# Altium PCB PCB2.PcbDoc (part 2 of 3)
Units mm, origin at the board's own origin, x right, y up, seen from the top; angles counter-clockwise.
Board outline 152.4 x 101.6 mm, 4 copper layers (Top Layer, Int1 (GND), Int2 (PWR), Bottom Layer), stack 1.569 mm thick; 115 components, 81 nets, 561 pads, 241 vias.
Unrouted connection lines stored in the file: 9.
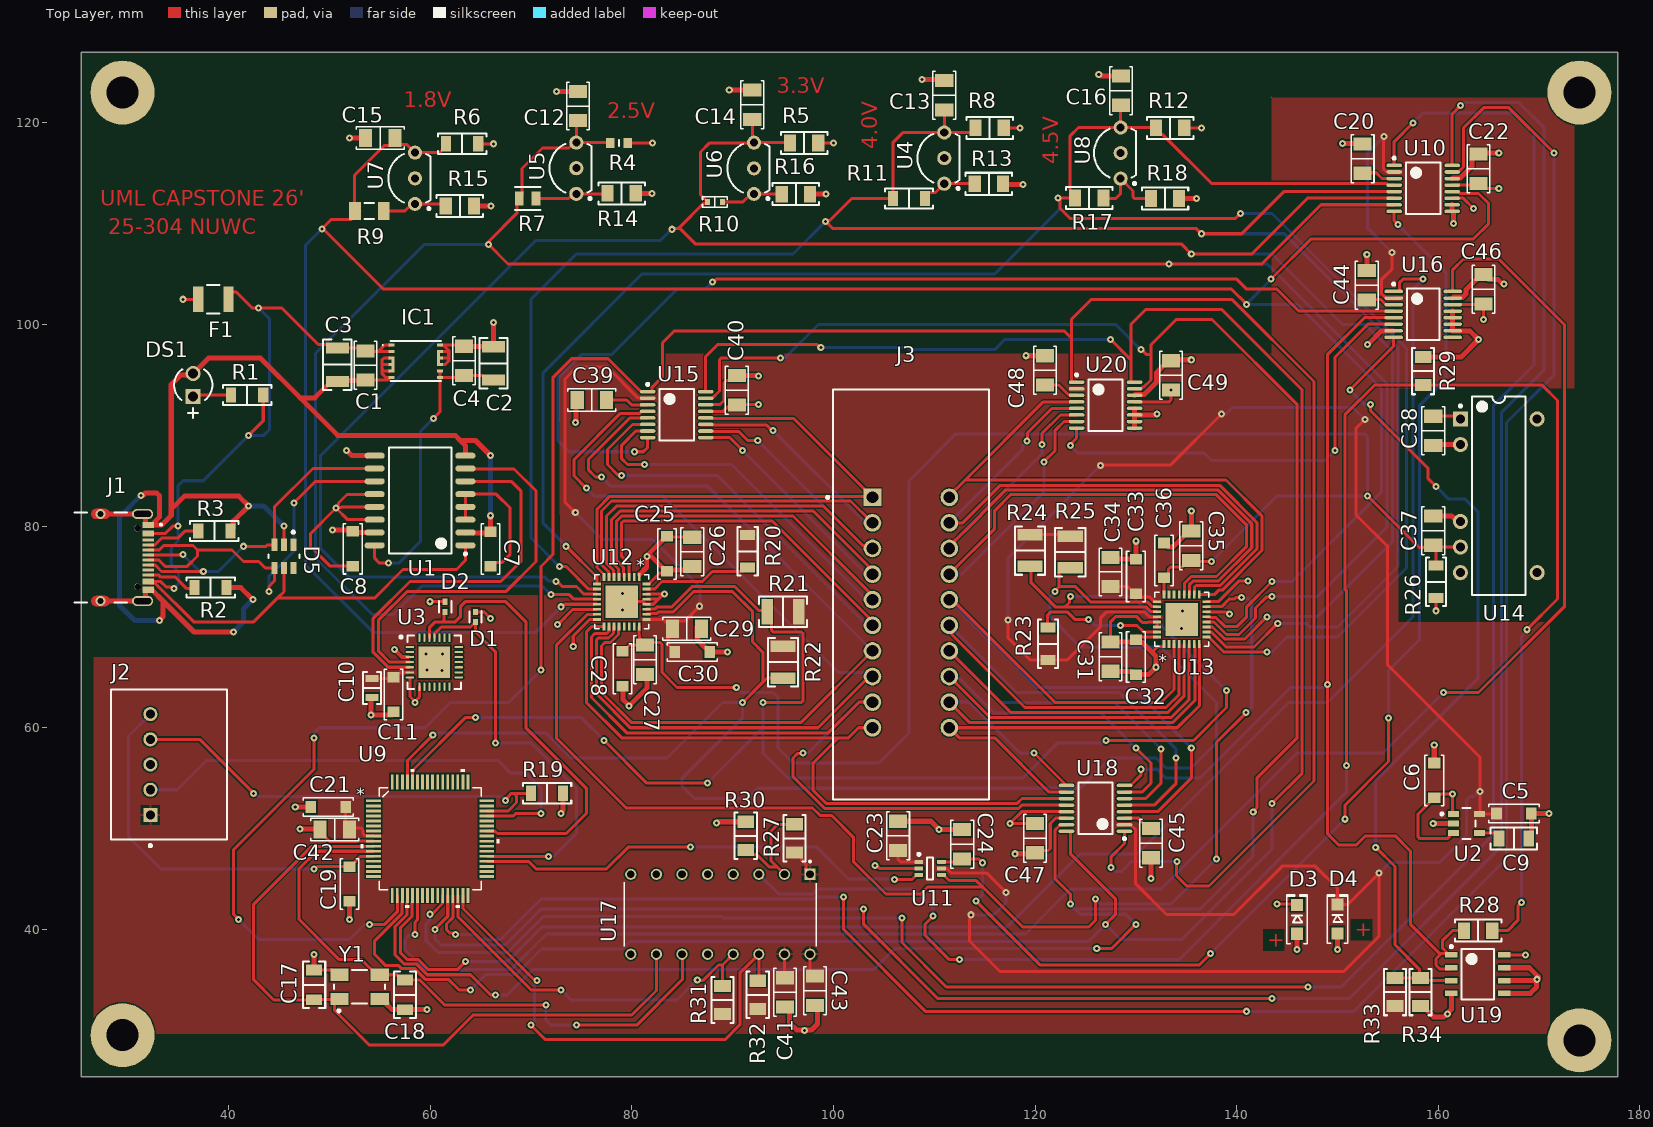
[diagram p0: Top Layer view]

## Via types
v1: diameter 0.7, hole 0.3, Top Layer to Bottom Layer, 241 vias

## Nets (pads, with @x,y where several pads share a name; then routed paths per layer and width w, separated by ;. In a path a pad name is that pad's centre, name@x,y a point inside that pad or via, vN(x,y) a via of type N, cw(c..) or ccw(c..) an arc to the next point about the centre after c; other vN are vias at no path point) (continued)
2X5: (continued)
  Top Layer w0.3: U18.10@123.125,53.625 121.375,53.625 116,59 112.5,59 J3.11@111.5,60 134.121,60 136.31,62.19 136.31,68.285 U13.8@136.298,68.298
2X6: J3.20 U13.17 U20.4 | length 59
  Top Layer w0.3: J3.20@111.5,82.86 111.5,83 113.07,84.57 ; U20.4@124.125,92.325 120.825,92.325 113.07,84.57 ; U13.17@136.298,73.202 137.781,73.202 138.231,73.652 138.577,73.652 142.5,77.575 142.5,81.02 138.95,84.57 113.07,84.57
2X7: J3.19 U13.18 U20.5 | length 62.7
  Top Layer w0.3: J3.19@111.5,80.32 112.82,80.32 116.55,84.05 138.314,84.05 142,80.364 142,77.727 138.375,74.102 138.043,74.102 138.041,74.1 135.973,74.1 135.798,73.924 U13.18@135.798,73.202 ; v1(119.2,88.45) 119.25,88.5 119.25,89.25 121.675,91.675 U20.5@124.125,91.675
  Bottom Layer w0.3: J3.19@111.5,80.32 118.743,87.563 118.743,87.885 119.2,88.342 v1(119.2,88.45)
2X8: J3.18 U13.19 U20.6 | length 64.4
  Top Layer w0.3: J3.18@111.5,77.78 111.5,78 113,79.5 113.022,79.5 114.663,81.141 114.663,81.175 117.088,83.6 138.127,83.6 141.5,80.227 141.5,77.864 138.189,74.552 137.857,74.552 137.854,74.55 135.686,74.55 135.31,74.174 135.31,73.215 U13.19@135.298,73.202 ; v1(120.7,88.1) 120.7,89.2 122.525,91.025 U20.6@124.125,91.025
  Bottom Layer w0.3: J3.18@111.5,77.78 111.5,77.99 120.7,87.19 v1(120.7,88.1)
2X9: J3.17 U13.20 U20.7 | length 67.8
  Top Layer w0.3: J3.17@111.5,75.24 116,79.74 116,81.529 117.621,83.15 137.941,83.15 141,80.091 141,78 138.002,75.002 137.67,75.002 137.668,75 135.5,75 134.81,74.31 134.81,73.215 U13.20@134.798,73.202 ; v1(120.872,86.372) 122,87.5 122,89.5 122.875,90.375 U20.7@124.125,90.375
  Bottom Layer w0.3: J3.17@111.5,75.24 112.74,75.24 120.872,83.372 v1(120.872,86.372)
2Y0: C16.2 R12.1 R17.2 U8.3 U10.4 U12.9 U13.9 | length 214.2
  Top Layer w0.3: v1(73.5,78) 76.548,74.952 U12.9@76.548,74.25 ; v1(122.275,112.55) 122.5,112.55 123.75,112.55 123.525,112.775 123.525,113.364 123.488,113.401 123.488,118.713 124.315,119.54 U8.3@128.5,119.54 ; v1@122.5,112.5 122.5,111.5 123.475,110.525 139.893,110.525 v1(140.368,111) ; C16.2@128.575,121.55 128.5,121.475 U8.3@128.5,119.54 ; U13.9@137,69 137.24,69 138.74,67.5 v1(143,67.5) ; U10.4@155.625,113.825 155.011,113.825 154.836,114 137.5,114 132.675,118.825 132.45,118.825 132,119.275 R12.1@132,119.5 131.96,119.54 U8.3@128.5,119.54
  Bottom Layer w0.3: v1(73.5,78) 71.175,80.325 71.175,95.175 81,105 116,105 122.5,111.5 v1@122.5,112.5 ; v1(140.368,111) 143.5,111 156.845,97.655 156.845,75.845 150,69 145,69 143.516,67.516 143.016,67.516 v1(143,67.5)
2Y1: C13.2 R8.1 R11.2 U4.3 U10.5 U12.10 U13.10 | length 216.4
  Top Layer w0.3: v1(72.815,76) 73.5,76 75.75,73.75 U12.10@76.548,73.75 ; C13.2@111,121 U4.3@111,119.04 ; R8.1@114.1,119.5 114.1,119.49 113.65,119.04 U4.3@111,119.04 ; U13.10@137,69.5 137.013,69.487 137.477,69.487 138.964,68 141.722,68 v1(144.079,70.357) ; U10.5@155.625,113.175 144.675,113.175 140.5,109 v1(136.5,109) 136,109.5 99.971,109.5 v1(99.236,110.236) 99.312,110.312 99.644,110.312 101.832,112.5 R11.2@105.9,112.5 105.9,118.025 106.895,119.02 110.98,119.02 U4.3@111,119.04
  Bottom Layer w0.3: v1(72.815,76) 70,78.815 70,102.5 74.5,107 96,107 v1(99.236,110.236) ; v1(136.5,109) 144.722,109 156,97.722 156,76 150,70 147.272,70 146.915,70.357 v1(144.079,70.357)
2Y2: C14.2 R5.1 R10.2 U6.3 U10.6 U12.11 U13.11 | length 243.8
  Top Layer w0.3: v1(72.5,74.5) 72.608,74.5 73.108,74 74.523,74 75.273,73.25 U12.11@76.548,73.25 ; v1(83.979,109.443) 84.056,109.52 84.622,109.52 84.701,109.599 87.093,111.991 87.393,111.991 87.493,112.091 R10.2@87.493,112.141 87.493,112.191 86.825,112.859 86.825,117.1 87.745,118.02 91.98,118.02 U6.3@92,118.04 ; 84.8,109.5 86.3,108 134.5,108 v1(135.5,107) 141.5,107 147.025,112.525 U10.6@155.625,112.525 ; C14.2@92.025,120.075 92,120.05 U6.3@92,118.04 ; R5.1@95.7,118 95.66,118.04 U6.3@92,118.04 ; U13.11@137,70 137.013,69.987 137.613,69.987 138.808,68.793 140.793,68.793 v1(143,71)
  Bottom Layer w0.3: v1(72.5,74.5) 72.423,74.577 71.727,74.577 71.374,74.93 51.97,74.93 49.149,77.751 49.149,86.995 70.479,108.325 82.825,108.325 v1@84,109.5 ; v1(135.5,107) 143.5,107 150.5,100 152.769,100 155.45,97.319 155.45,78.45 148.057,71.057 143.789,71.057 143.732,71 v1(143,71)
2Y3: C12.2 R4.1 R7.2 U5.3 U10.7 U12.12 U13.12 | length 251.9
  Top Layer w0.3: v1(72,73.2) 73.8,73.2 74.25,72.75 U12.12@76.548,72.75 ; C12.2@74.675,120.05 74.5,119.875 U5.3@74.5,118.04 ; R4.1@77.89,117.983 77.833,118.04 U5.3@74.5,118.04 ; U13.12@137,70.5 137.013,70.487 137.749,70.487 138.994,69.243 140.243,69.243 141.876,70.876 141.876,71.876 142.984,72.984 143.484,72.984 v1(143.5,73) ; U10.7@155.625,111.875 148.375,111.875 142.5,106 v1(133.299,106) 67.736,106 v1(65.786,107.95) 65.863,108.027 65.863,108.281 68.603,111.021 68.603,112.254 69.125,112.776 69.125,115.48 71.145,117.5 73.774,117.5 74.314,118.04 U5.3@74.5,118.04
  Bottom Layer w0.3: v1(65.786,107.95) 59.45,107.95 48.641,97.141 48.641,76.835 54.229,71.247 56.388,71.247 59.182,74.041 71.159,74.041 v1(72,73.2) ; v1(133.299,106) 143.047,106 154.9,94.147 154.9,79.9 148,73 v1(143.5,73)
2Y4: C15.2 R6.1 R9.2 U7.3 U10.12 U12.13 U13.13 | length 265.6
  Top Layer w0.3: v1(49.259,109.48) 50.183,110.404 52.202,110.404 R9.2@53.05,111.252 ; v1@49.523,109.354 55.377,103.5 139.5,103.5 v1(141,102) ; R9.2@52.549,111.252 52.5,111.301 52.5,114.8 55.45,117.75 56,117.75 56.5,118.25 C15.2@56.5,118.5 ; C15.2@56.5,118.353 57,117.853 57.687,117.853 U7.3@58.5,117.04 60.94,117.04 61.575,117.675 R6.1@61.575,117.925 ; v1(73,72) 73.108,72 73.358,72.25 76.3,72.25 76.35,72.3 U12.13@76.45,72.3 ; U13.13@137,71 137.013,70.987 137.358,70.987 137.408,70.937 137.936,70.937 138.812,70.061 140.061,70.061 141,71 141,72 v1(143.5,74.5) ; v1(143.41,104.51) 147.4,108.5 163.5,108.5 165,110 165,112 164,113 162.164,113 161.989,113.175 U10.12@161.375,113.175
  Bottom Layer w0.3: v1(49.259,109.48) 49.259,109.468 47.625,107.834 47.625,76.2 54.356,69.469 70.469,69.469 v1(73,72) ; v1(143.41,104.51) 143.41,104.46 141,102.05 v1(141,102) 146,102 154.35,93.65 154.35,83.35 145.5,74.5 v1(143.5,74.5)